# Altium PCB PCB1.PcbDoc
Units mm, origin at the board's own origin, x right, y up, seen from the top; angles counter-clockwise.
Board outline 152.4 x 101.6 mm, 2 copper layers (Top Layer, Bottom Layer); 13 components, 36 nets, 93 pads, 24 vias.
Unrouted connection lines stored in the file: 26.
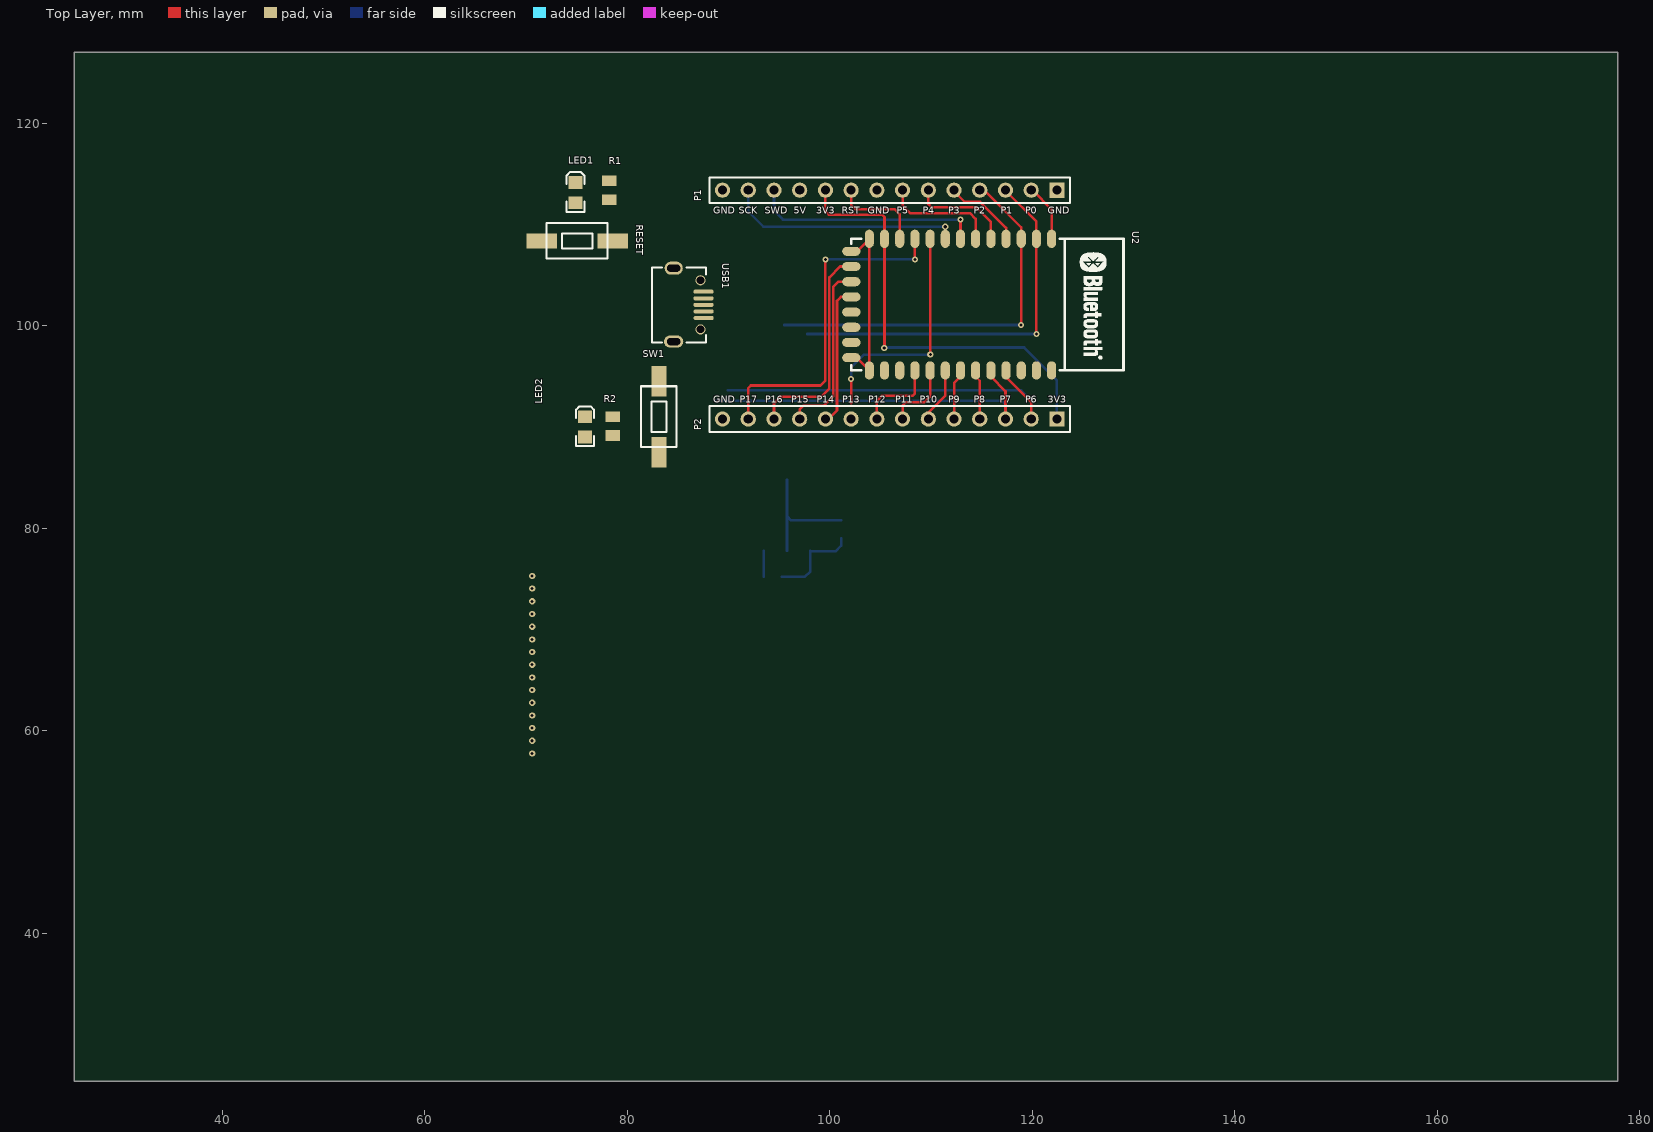
[diagram p0: Top Layer view]
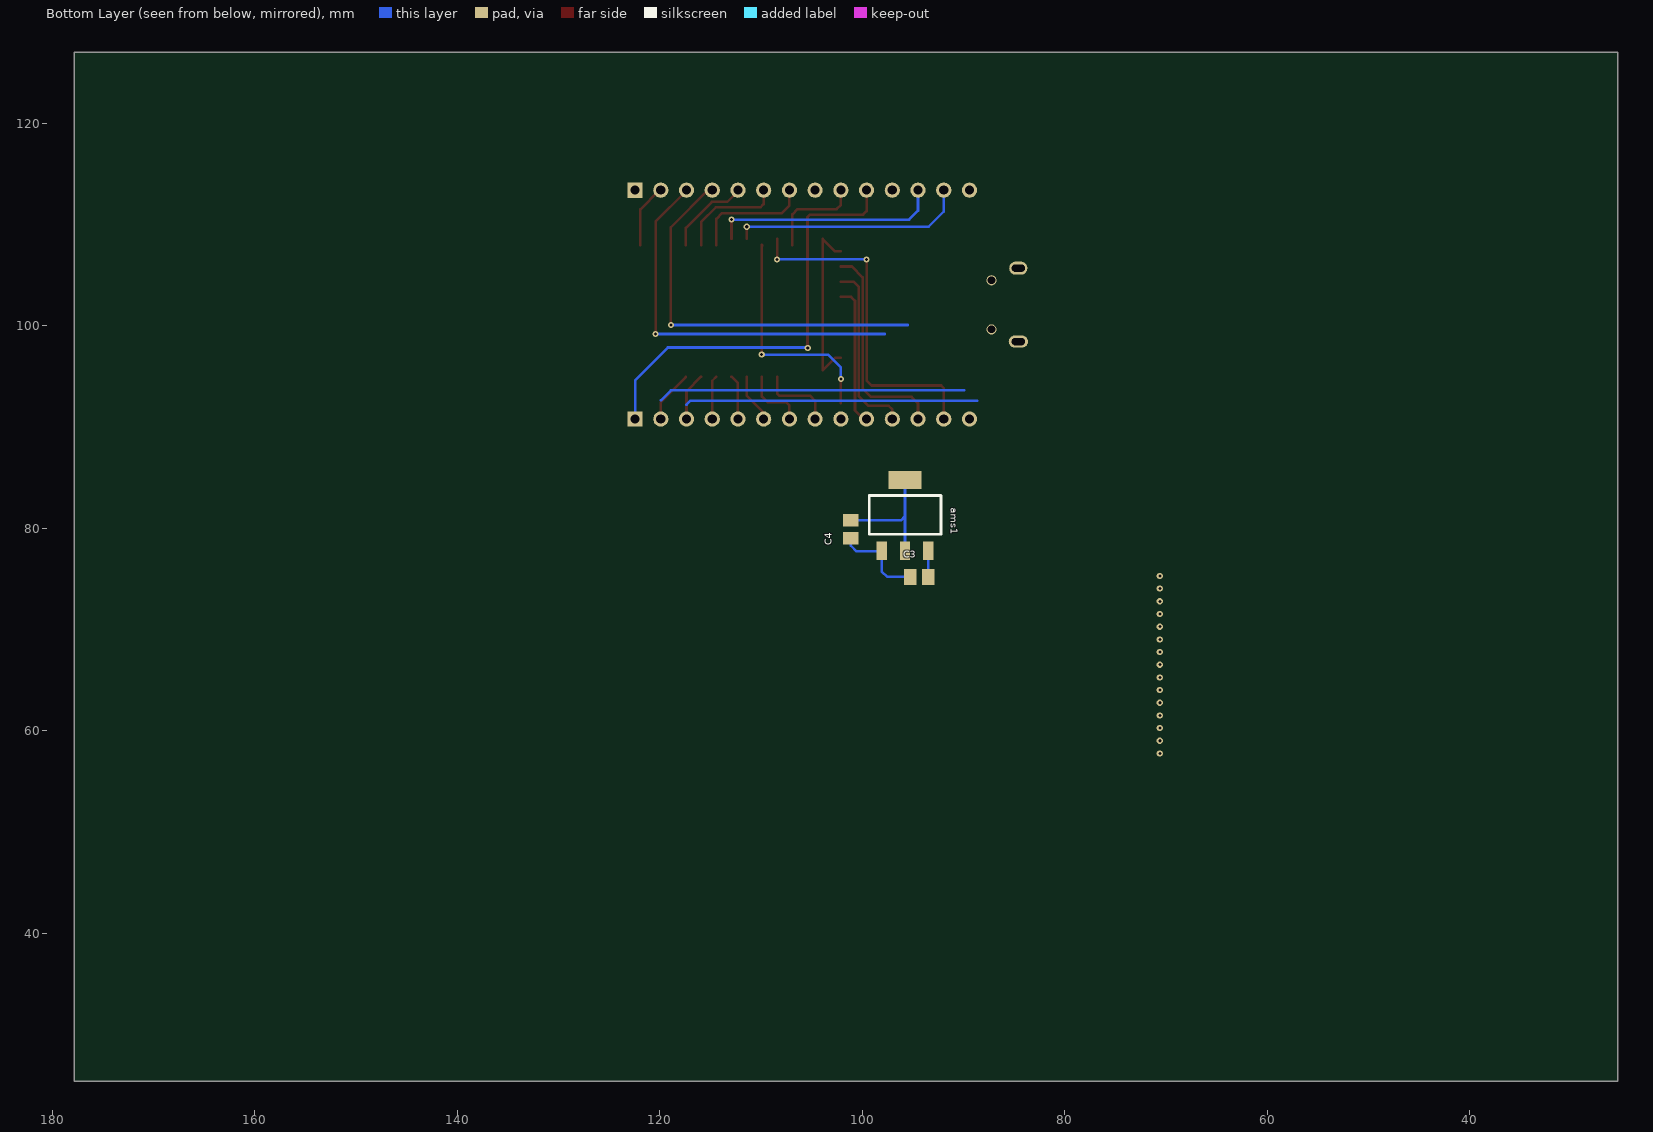
[diagram p1: Bottom Layer view, seen from below]

## Layer stack, top to bottom
Top Solder: solder mask 0.0102, Solder Resist, Dk 3.5
Top Layer: signal copper 0.0356
Dielectric 1: dielectric 0.32, FR-4, Dk 4.8
Bottom Layer: signal copper 0.0356
Bottom Solder: solder mask 0.0102, Solder Resist, Dk 3.5

## Board outline
25.4,25.4 177.8,25.4 177.8,127 25.4,127

## Design rules (kind name [scope] priority, off if disabled: settings)
Clearance Clearance_1 [(InNet('GND') AND InPolygon)] p1: gap=0.5
Clearance [All] p2: gap=0.127
PolygonConnect [All] p1: connectstyle=Relief reliefconductorwidth=0.254 reliefentries=4 polygonreliefangle="90 Angle" airgapwidth=0.254
RoutingVias [All] p1: holewidth=0.711 width=1.27 viastyle="Through Hole" minholewidth=0.711 minwidth=1.27 maxholewidth=0.711 maxwidth=1.27
SolderMaskExpansion [All] p1: expansion=0.102
Width [All] p1: maxlimit=1 minlimit=0.254 preferedwidth=0.5
30 further rules are at their usual default settings.

## Components (designator, comment, footprint, x,y, rotation, side; value= is the part's Value field where it differs from the comment)
ams1 "AMS1117" SOT-223 98.073,77.78 r0 bottom
C3 "Cap Semi" C0805 94.375,75.2 r180 bottom
C4 "Cap Semi" C0805 101.125,79.9 r90 bottom
LED1 "LED1" "0805 2.0X1.25X1.1" 74.885,113.136 r90 top
LED2 "LED1" "0805 2.0X1.25X1.1" 75.834,90.007 r90 top
P1 "Header 14" HDR1X14 122.428,113.385 r180 top
P2 "Header 14" HDR1X14 122.428,90.785 r180 top
R1 "Resistors SMD" R0805-M 78.225,113.375 r90 top
R2 "Resistors SMD" R0805-M 78.575,90.081 r270 top
RESET "SW-PB" SWITCH_SMD_6x3.5 75.05,108.375 r0 top
SW1 "SW-PB" SWITCH_SMD_6x3.5 83.125,91.025 r90 top
U2 "nRF52832" BlueTooth_34_SMD 114.935,102.085 r270 top
USB1 "USB-MICRO" USB-MICRO 84.582,102.06 r270 top

## Footprints (in the part's own frame and the unit in brackets; to place one, negate y for a bottom-side part, rotate by r counter-clockwise, add the part's x,y. Pads: shape width x height; smd on the part's side, far side on the other; paste and mask are expansions set on the pad)
"0805 2.0X1.25X1.1" [mm] "Chip LED, Body 2.0x1.25mm"
  rect 1.25x1.35 smd: 1(-1,0) 2(1,0)
  Top Layer pour cut-out: -0.25,0.875 0.25,0.875 0.25,-0.875 -0.25,-0.875
  silkscreen extent -1.9,-0.87 2.02,0.87, body extent -1.01,-0.63 1.01,0.62, height 1.1
BlueTooth_34_SMD [mm]
  oval 1.8x0.9 smd: 1(-6.5,6.968) 2(-6.5,5.468) 3(-6.5,3.968) 4(-6.5,2.468) 5(-6.5,0.968) 6(-6.5,-0.532) 7(-6.5,-2.032) 8(-6.5,-3.532) 9(-6.5,-5.032) 10(-6.5,-6.532) 11(-6.5,-8.032) 12(-6.5,-9.532) 13(-6.5,-11.032) 22(6.5,-11.032) 23(6.5,-9.532) 24(6.5,-8.032) 25(6.5,-6.532) 26(6.5,-5.032) 27(6.5,-3.532) 28(6.5,-2.032) 29(6.5,-0.532) 30(6.5,0.968) 31(6.5,2.468) 32(6.5,3.968) 33(6.5,5.468) 34(6.5,6.968)
  oval 0.9x1.8 smd: 14(-5.262,-12.81) 15(-3.762,-12.81) 16(-2.262,-12.81) 17(-0.762,-12.81) 18(0.738,-12.81) 19(2.238,-12.81) 20(3.738,-12.81) 21(5.238,-12.81)
  silkscreen extent -6.5,-12.81 6.5,14.07
C0805 [mm] "Chip Capacitor, EIA 0805, IPC-7351 Level B Medium Density"
  round 0.254 on Mech15: 0(0,0)
  rect 1.24x1.56 smd: 1(-0.89,0) 2(0.89,0)
  Top Layer pour cut-out: -0.2,0.775 0.2,0.775 0.2,-0.775 -0.2,-0.775
  body extent -1,-0.62 1,0.63, height 0.58
HDR1X14 [mm] "Connector; Header; 14 Position"
  rect 1.5x1.5 hole 0.9: 1(0,0)
  round 1.5 hole 0.9: 2(2.54,0) 3(5.08,0) 4(7.62,0) 5(10.16,0) 6(12.7,0) 7(15.24,0) 8(17.78,0) 9(20.32,0) 10(22.86,0) 11(25.4,0) 12(27.94,0) 13(30.48,0) 14(33.02,0)
  silkscreen extent -1.27,-1.27 34.29,1.27
R0805-M [mm] "Chip Resistor, 2-Leads, Body 2.10x1.35mm, IPC Medium Density"
  rect 1.05x1.45 smd: 1(-0.925,0) 2(0.925,0)
  Top Layer pour cut-out: -0.381,0.925 0.381,0.925 0.381,-0.925 -0.381,-0.925
  body extent -1,-0.62 1,0.63, height 0.44
SOT-223 [mm]
  rect 3.3x1.8 smd: 0(-2.3,-7)
  rect 1x1.8 smd: 1(0,0) 2(-2.3,0) 3(-4.6,0)
  silkscreen extent -5.85,-5.45 1.25,-1.64
SWITCH_SMD_6x3.5 [mm]
  rect 3x1.5 smd: 1(-3.5,0) 2(3.5,0)
  silkscreen extent -3,-1.75 3,1.75
USB-MICRO [mm] "USB方孔"
  oval 1.3x1.8 hole 0.7 slot 1.3 at 90 deg: 0(-3.625,0)
  round 1 hole 0.75: 0(-2.425,2.65) 0(2.425,2.65)
  oval 1.2x1.9 hole 0.7 slot 1.3 at 90 deg: 0(3.625,0)
  oval 0.4x2 smd: 1(-1.3,2.95) 2(-0.65,2.95) 3(0,2.95) 4(0.65,2.95) 5(1.3,2.95)
  silkscreen extent -3.7,-2.15 3.7,3.21

## Part data
C3 C4: "Capacitor (Semiconductor SIM Model)"
LED1 LED2: library part LED, "Typical INFRARED GaAs LED"
P1 P2: "Header, 14-Pin"
R1 R2: "Resistor"
RESET SW1: "按鈕開關"

## Via types
v1: diameter 0.61, hole 0.305, Top Layer to Bottom Layer, tented both sides, 24 vias

## Nets (pads, with @x,y where several pads share a name; then routed paths per layer and width w, separated by ;. In a path a pad name is that pad's centre, name@x,y a point inside that pad or via, vN(x,y) a via of type N, cw(c..) or ccw(c..) an arc to the next point about the centre after c; other vN are vias at no path point)
3V3: ams1.0 ams1.2 C4.2 P1.10 P2.1 R1.2 R2.2 U2.12 | length 55.9
  Top Layer w0.254: P1.10@99.568,113.411 99.568,111.307 99.9,110.975 105.15,110.975 105.403,110.722 v1@105.403,97.8
  Bottom Layer w0.254: ams1.2 95.773,81.2 ; ams1.0 95.773,81.2 ; C4.2 96.183,80.79 95.773,81.2 ; v1(105.375,97.8) 105.425,97.85 119.193,97.85 122.428,94.615 P2.1
BGT24_EN: P2.5 U2.28 | length 4.5
  Top Layer w0.254: P2.5 112.268,94.338 U2.28@112.903,94.973
D+: USB1.3
D-: USB1.2
EN: P2.4 U2.29 | length 4.4
  Top Layer w0.254: U2.29@114.403,94.973 114.808,94.568 P2.4
GND: ams1.1 C3.1 C4.1 LED1.2 P1.1 P1.8 P1.14 P2.14 RESET.2 SW1.2 U2.13 U2.14 U2.21 U2.22 USB1.0 USB1.5 | length 26.7
  Top Layer w0.254: U2.21 102.641,96.847 U2.22 U2.13 102.665,107.347 U2.14
  Bottom Layer w0.254: C3.1 97.525,75.2 98.073,75.748 ams1.1 98.128,77.725 100.575,77.725 101.125,78.275 C4.1
I_CW: P2.10 U2.17 | length 13.9
  Top Layer w0.254: P2.10 99.86,90.785 100.711,91.636 100.711,102.461 101.097,102.847 U2.17
I_HIGHGAIN: P2.13 U2.10 | length 33.8
  Top Layer w0.254: P2.13 91.948,93.848 92.2,94.1 99.075,94.1 99.568,94.593 v1(99.568,106.55) ; v1(108.403,106.553) U2.10
  Bottom Layer w0.254: v1(99.568,106.55) 99.571,106.553 v1(108.403,106.553)
MUXOUT: P1.4 U2.3 | length 38.7
  Top Layer w0.254: P1.4@115.011,113.589 118.903,109.697 118.903,107.973 v1@118.903,99.918
  Bottom Layer w0.254: 95.504,100.076 v1(118.872,100.076)
NetLED1_1: LED1.1 R1.1
NetLED2_1: LED2.1 R2.1
P0: P1.2 U2.1 | length 6.4
  Top Layer w0.254: P1.2@119.837,113.334 120.066,113.334 121.903,111.497 U2.1@121.903,107.973
P0.06: U2.18
P0.07: U2.19
P0.08: U2.20
P0.09: U2.23
P0.10: U2.24
P0.18: U2.32
P0.19: U2.33
P0.20: U2.34
P1: P1.3 U2.2 | length 38.1
  Top Layer w0.254: P1.3@117.424,113.462 117.424,113.251 120.403,110.272 v1@120.403,99.18
  Bottom Layer w0.254: 97.79,99.187 v1(120.396,99.187)
P3: P1.5 U2.4 | length 8.4
  Top Layer w0.254: P1.5@112.217,113.335 113.327,112.225 114.851,112.225 117.403,109.673 U2.4@117.403,107.973
P4: P1.6 U2.5 | length 10.6
  Top Layer w0.254: P1.6 109.728,112.014 110.042,111.7 114.45,111.7 115.903,110.247 U2.5@115.903,107.973
P5: P1.7 U2.6 | length 11.9
  Top Layer w0.254: P1.7 107.188,111.862 107.925,111.125 113.825,111.125 114.403,110.547 U2.6@114.403,107.973
P6: P2.2 SW1.1 U2.31 | length 35.6
  Top Layer w0.254: U2.31@117.403,94.973 117.403,94.941 119.888,92.456 P2.2
  Bottom Layer w0.254: 89.916,93.625 118.9,93.625 119.888,92.637
P7: LED2.2 P2.3 U2.30 | length 33.7
  Top Layer w0.254: U2.30@115.903,94.973 117.348,93.528 P2.3
  Bottom Layer w0.254: 88.646,92.6 116.95,92.6 117.348,92.202
P10: P2.6 U2.27 | length 4.9
  Top Layer w0.254: P2.6 109.728,91.44 111.403,93.115 U2.27@111.403,94.973
P11: P2.7 U2.26 | length 6.4
  Top Layer w0.254: P2.7 107.188,92.138 107.506,92.456 109.347,92.456 109.903,93.012 U2.26@109.903,94.973
P12: P2.8 U2.25 | length 7.5
  Top Layer w0.254: P2.8 104.648,92.583 105.156,93.091 108.204,93.091 108.403,93.29 U2.25@108.403,94.973
P13: P2.9 U2.9 | length 22.8
  Top Layer w0.254: 102.108,92.325 v1(102.108,94.742) ; U2.9@109.903,107.973 109.855,107.925 109.93,107.85 109.925,107.844 v1(109.925,97.15)
  Bottom Layer w0.254: v1(102.108,94.742) 102.108,95.885 103.373,97.15 v1(109.925,97.15)
P15: P2.11 U2.16 | length 17.6
  Top Layer w0.254: P2.11 97.028,91.728 97.378,92.078 99.378,92.078 100.33,93.03 100.33,103.805 100.872,104.347 U2.16
P16: P2.12 U2.15 | length 21.2
  Top Layer w0.254: P2.12 94.488,92.338 95.125,92.975 99.125,92.975 99.949,93.799 99.949,104.775 101.021,105.847 U2.15
RST: P1.9 RESET.1 U2.11 | length 9.7
  Top Layer w0.254: P1.9 102.108,111.917 102.519,111.506 106.394,111.506 106.903,110.997 U2.11@106.903,107.973
SW_DCLK: P1.13 U2.8 | length 23.4
  Top Layer w0.254: U2.8 v1(111.403,109.775)
  Bottom Layer w0.254: P1.13 91.948,111.277 93.45,109.775 v1(111.403,109.775)
SW_DIO: P1.12 U2.7 | length 22.7
  Top Layer w0.254: U2.7 v1(112.903,110.475)
  Bottom Layer w0.254: P1.12 94.488,111.362 95.375,110.475 v1(112.903,110.475)
V_USB: ams1.3 C3.2 P1.11 USB1.1 | length 2.6
  Bottom Layer w0.254: C3.2@93.473,75.212 ams1.3
pads on no net: C3.0 C4.0 USB1.4
copper on no net:
  other v1: 70.612,57.767 70.612,59.019 70.612,60.271 70.612,61.522 70.612,62.774 70.612,64.026 70.612,65.278 70.612,66.53 70.612,67.782 70.612,69.034 70.612,70.285 70.612,71.537 70.612,72.789 70.612,74.041 70.612,75.293

## Silkscreen, mask and mechanical layers (free items; w line width, h text height)
Top Overlay:
  text "GND" at 88.494,111.05 h0.69
  text "SCK" at 91.034,111.05 h0.69
  text "SWD" at 93.574,111.05 h0.69
  text "5V" at 96.457,111.05 h0.69
  text "3V3" at 98.654,111.05 h0.69
  text "RST" at 101.194,111.05 h0.69
  text "GND" at 103.734,111.05 h0.69
  text "P5" at 106.617,111.05 h0.69
  text "P4" at 109.157,111.05 h0.69
  text "P3" at 111.697,111.05 h0.69
  text "P2" at 114.237,111.05 h0.69
  text "P1" at 116.891,111.05 h0.69
  text "P0" at 119.317,111.05 h0.69
  text "GND" at 121.514,111.05 h0.69
  text "GND" at 88.494,92.4 h0.69
  text "P17" at 91.091,92.4 h0.69
  text "P16" at 93.631,92.4 h0.69
  text "P15" at 96.171,92.4 h0.69
  text "P14" at 98.711,92.4 h0.69
  text "P13" at 101.251,92.4 h0.69
  text "P12" at 103.791,92.4 h0.69
  text "P11" at 106.445,92.4 h0.69
  text "P10" at 108.871,92.4 h0.69
  text "P9" at 111.697,92.4 h0.69
  text "P8" at 114.237,92.4 h0.69
  text "P7" at 116.777,92.4 h0.69
  text "P6" at 119.317,92.4 h0.69
  text "3V3" at 121.514,92.4 h0.69